# Altium PCB Copy of msp430g2553.PcbDoc
Units mil, origin at the board's own origin, x right, y up, seen from the top; angles counter-clockwise.
Board outline 2455 x 3285 mil, 2 copper layers (Top Layer, Bottom Layer); 27 components, 20 nets, 111 pads, 11 vias.
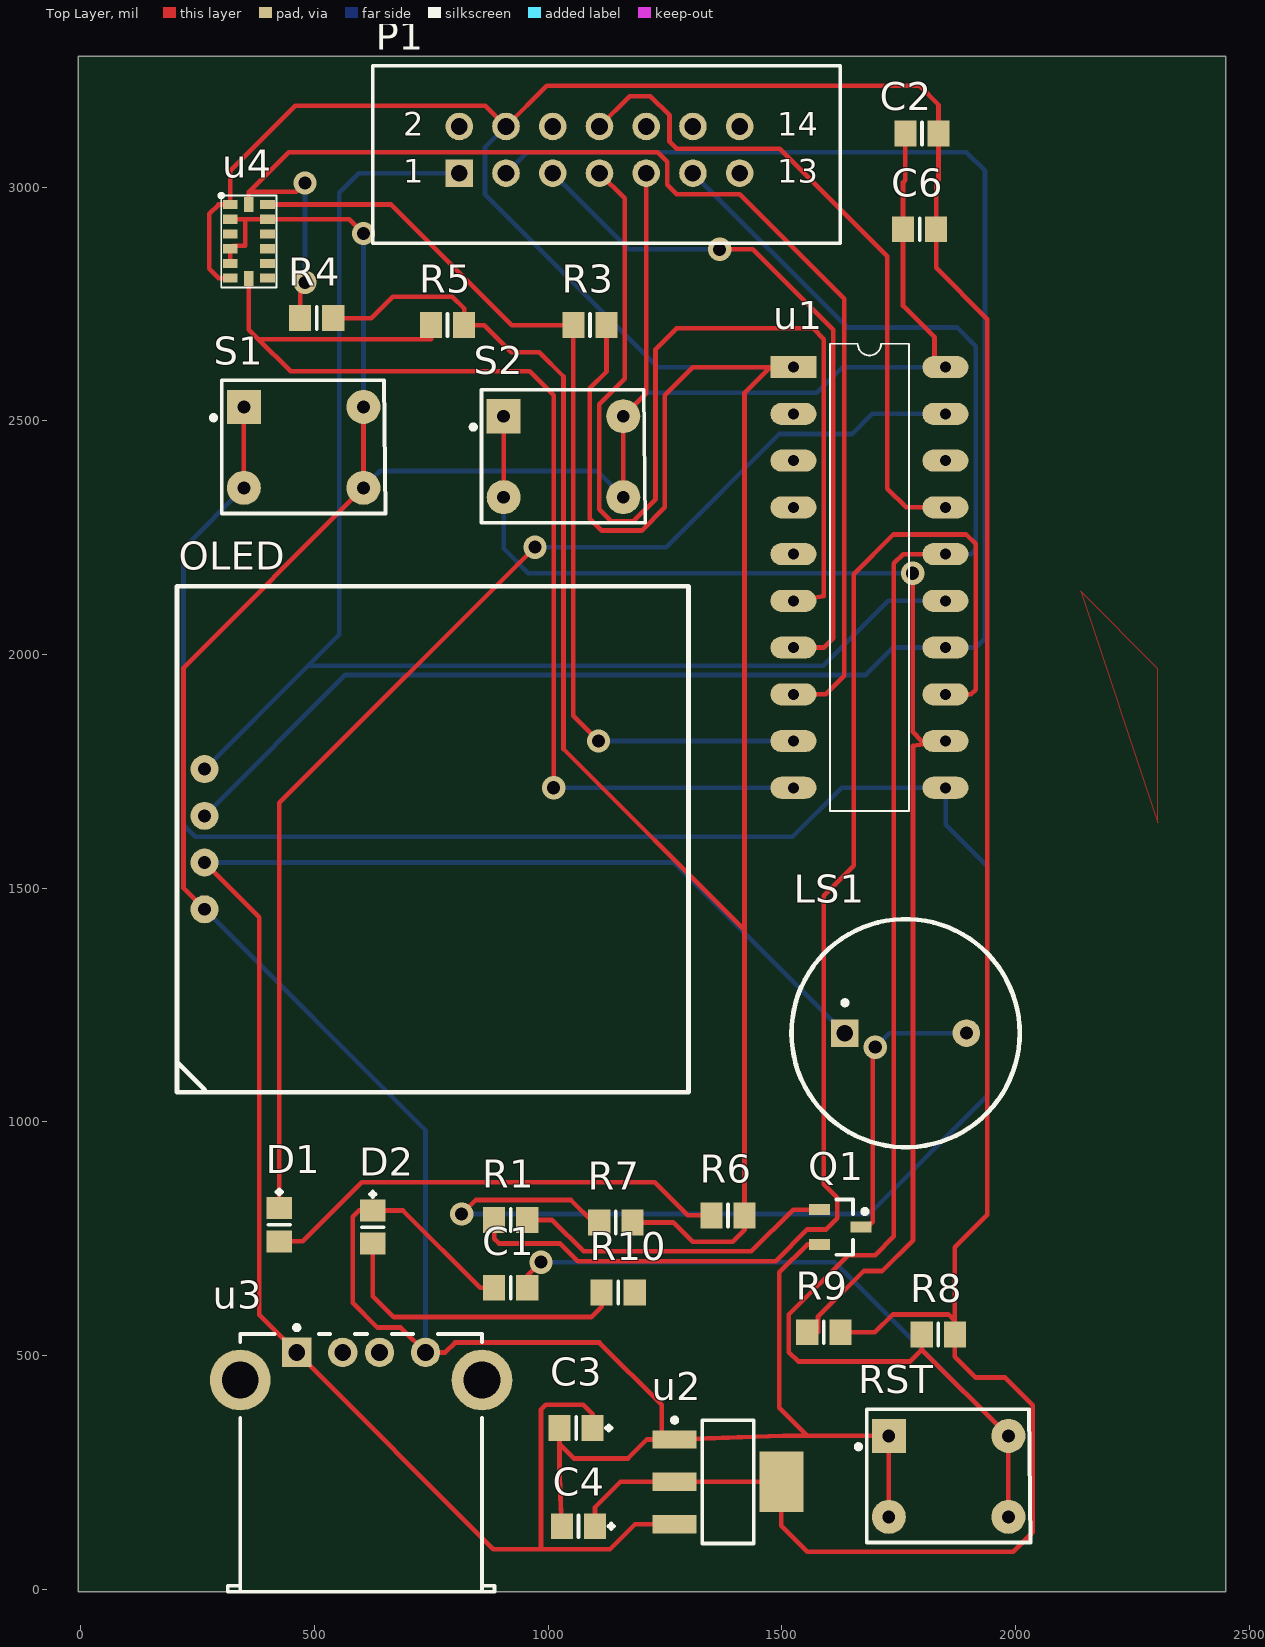
[diagram p0: Top Layer view]
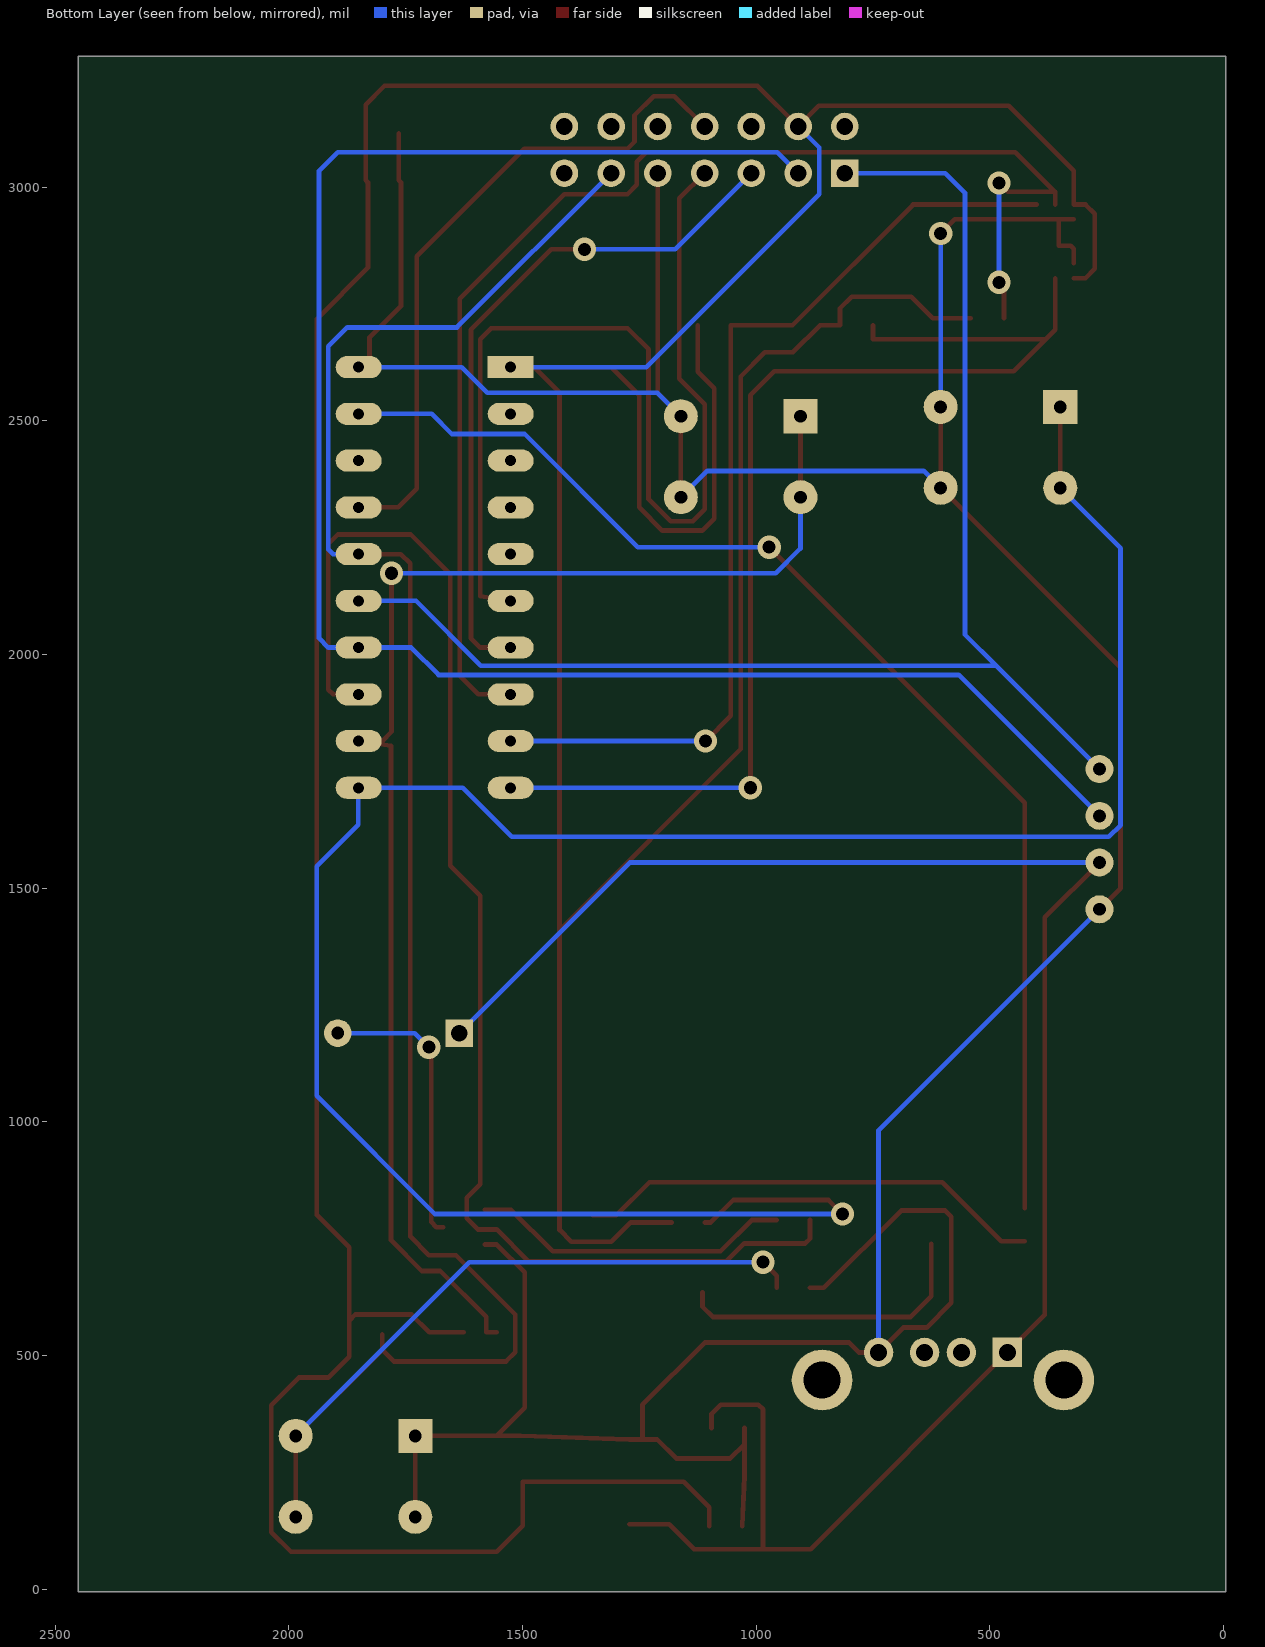
[diagram p1: Bottom Layer view, seen from below]

## Layer stack, top to bottom
Top Solder: solder mask 0.4, Solder Resist, Dk 3.5
Top Layer: signal copper 1.4
Dielectric 1: dielectric 12.6, FR-4, Dk 4.8
Bottom Layer: signal copper 1.4
Bottom Solder: solder mask 0.4, Solder Resist, Dk 3.5

## Board outline
-5,-5 2450,-5 2450,3280 -5,3280

## Design rules (kind name [scope] priority, off if disabled: settings)
Clearance [All] p1: gap=10 ignorepadtopadclearanceinfootprint=FALSE except(0: Arc-Hole Track-Hole SMDPad-Hole THPad-Hole Via-Hole Fill-Hole Poly-Hole Region-Hole Text-Hole)
PolygonConnect [All] p1: connectstyle=Relief reliefconductorwidth=10 reliefentries=4 polygonreliefangle="90 Angle" airgapwidth=10
RoutingVias [All] p1: holewidth=28 width=50 viastyle="Through Hole" minholewidth=28 minwidth=50 maxholewidth=28 maxwidth=50
SolderMaskExpansion [All] p1: expansion=4
Width [All] p1: maxlimit=10 minlimit=10 preferedwidth=10
30 further rules are at their usual default settings.

## Components (designator, comment, footprint, x,y, rotation, side; value= is the part's Value field where it differs from the comment)
C1 "Cap" 6-0805_N 920,645 r0 top value=100pF
C2 "Cap" 6-0805_N 1800,3115 r0 top value=100pF
C3 "Cap Pol2" "6-0805_N - duplicate" 1060,345 r0 top value=10uF
C4 "Cap Pol2" "6-0805_N - duplicate" 1065,135 r0 top value=22uF
C6 "Cap" 6-0805_N 1795,2910 r0 top value=100pF
D1 "LED0" "6-0805_N - duplicate" 425,780 r90 top
D2 "LED0" "6-0805_N - duplicate" 625,775 r90 top
LS1 "Bell" bell 1635.16,1190 r0 top
OLED "+5" OLED 1300.43,1063.66 r90 top
P1 "JTAG" HDR2X7 810,3030 r0 top
Q1 "NPN" SOT23_N 1625,775 r0 top
R1 "Res2" 6-0805_N 920,790 r0 top value=1K
R3 "Res2" 6-0805_N 1089.57,2705 r0 top value=1K
R4 "Res2" 6-0805_N 505,2720 r0 top value=1K
R5 "Res2" 6-0805_N 785,2705 r0 top value=1K
R6 "Res2" 6-0805_N 1385,800 r0 top value=1K
R7 "Res2" 6-0805_N 1145,785 r0 top value=1K
R8 "Res2" 6-0805_N 1835,545 r0 top value=1K
R9 "Res2" 6-0805_N 1590,550 r0 top value=1K
R10 "Res2" 6-0805_N 1150,635 r0 top value=1K
RST "SW-DPST" DPST-4 1729.09,155 r0 top
S1 "SW-DPST" DPST-4 349.09,2356.77 r0 top
S2 "SW-DPST" DPST-4 905,2336.77 r0 top
u1 "msp430g2553_PDIP20" DIP20 1525,2615 r0 top
u2 "AMS1117-3.3V" SOT223_N 1385,230 r0 top
u3 "USB" USB2.5-2H4 600,-5 r270 top
u4 "ADXL345" ADXL345 300.71,2982.28 r0 top

## Footprints (in the part's own frame and the unit in brackets; to place one, negate y for a bottom-side part, rotate by r counter-clockwise, add the part's x,y. Pads: shape width x height; smd on the part's side, far side on the other; paste and mask are expansions set on the pad)
6-0805_N [mm] "Chip Resistor, Body 2.0x1.2mm, IPC Medium Density"
  rect 1.2x1.4 smd: 1(-0.9,0) 2(0.9,0)
  silkscreen extent 0,-0.6 0,0.6, body extent -1.07,-0.7 1.07,0.7, height 0.7
"6-0805_N - duplicate" [mm] "Chip Resistor, Body 2.0x1.2mm, IPC Medium Density"
  rect 1.2x1.4 smd: 1(-0.9,0) 2(0.9,0)
  silkscreen extent 0,-0.6 1.91,0.6, body extent -1.07,-0.7 1.07,0.7, height 0.7
ADXL345 [mm]
  rect 0.813x0.5 smd: 1(0.49,-0.49) 2(0.49,-1.29) 3(0.49,-2.09) 4(0.49,-2.89) 5(0.49,-3.69) 6(0.49,-4.49) 8(2.51,-4.49) 9(2.51,-3.69) 10(2.51,-2.89) 11(2.51,-2.09) 12(2.51,-1.29) 13(2.51,-0.49)
  rect 0.5x0.813 smd: 7(1.5,-4.51) 14(1.5,-0.49)
  silkscreen extent -0.13,-5 3,0.13
bell [mm] "Photosensitive Diode; 2 Leads"
  rect 1.5x1.5 hole 0.9: 1(0,0)
  round 1.5 hole 0.7: 2(6.6,0)
  silkscreen extent -2.9,-6.2 9.5,6.2
DIP20 [mm]
  rect 2.5x1.2 hole 0.6: 1(0,0)
  oval 2.5x1.2 hole 0.6: 2(0,-2.54) 3(0,-5.08) 4(0,-7.62) 5(0,-10.16) 6(0,-12.7) 7(0,-15.24) 8(0,-17.78) 9(0,-20.32) 10(0,-22.86) 11(8.26,-22.86) 12(8.26,-20.32) 13(8.26,-17.78) 14(8.26,-15.24) 15(8.26,-12.7) 16(8.26,-10.16) 17(8.26,-7.62) 18(8.26,-5.08) 19(8.26,-2.54) 20(8.26,0)
  silkscreen extent 1.99,-24.13 6.28,1.27
DPST-4 [mm] "Switch; 4 Leads"
  rect 1.85x1.85 hole 0.7: 1(0,4.4)
  round 1.85 hole 0.7: 2(0,0) 3(6.5,4.4) 4(6.5,0)
  silkscreen extent -1.78,-1.4 7.7,5.84
HDR2X7 [mm] "Connector; Header; 7x2 Position"
  rect 1.5x1.5 hole 0.9: 1(0,0)
  round 1.5 hole 0.9: 2(0,2.54) 3(2.54,0) 4(2.54,2.54) 5(5.08,0) 6(5.08,2.54) 7(7.62,0) 8(7.62,2.54) 9(10.16,0) 10(10.16,2.54) 11(12.7,0) 12(12.7,2.54) 13(15.24,0) 14(15.24,2.54)
  silkscreen extent -4.7,-3.81 20.7,5.84
OLED [mm]
  round 1.524 hole 0.7: 1(12.48,26.3) 2(9.94,26.3) 3(15.02,26.3) 4(17.56,26.3)
  silkscreen extent 0,0 27.5,27.81
SOT23_N [mm] "SOT23, 3-Leads, Body 2.9x1.3mm, Pitch 0.95mm, Lead Span 2.3mm - Reverse Pinning, IPC Medium Density"
  rect 1.15x0.6 smd: 1(1.125,0) 2(-1.125,0.95) 3(-1.125,-0.95)
  silkscreen extent -0.2,-1.5 1.48,1.5, body extent -0.7,-1.5 0.7,1.5, height 1.1
SOT223_N [mm] "SOT223, 4-Leads, Body 6.5x3.5mm, Pitch 2.3mm, Lead Span 7mm, IPC Medium Density"
  rect 2.4x1 smd: 1(-2.9,2.3) 2(-2.9,0) 3(-2.9,-2.3)
  rect 2.4x3.3 smd: 4(2.9,0)
  silkscreen extent -3.02,-3.35 1.4,3.47, body extent -1.85,-3.35 1.85,3.35, height 1.7
USB2.5-2H4 [mm] "Connector; USB1.1, Series A, Reverse Type, Thru-Hole; 4 Position; Right Angle"
  rect 1.6x1.6 hole 0.92: 1(-13,-3.5)
  round 1.6 hole 0.92: 2(-13,-1) 3(-13,1) 4(-13,3.5)
  round 3.3 hole 2: 5(-11.5,6.57) 6(-11.5,-6.57)
  silkscreen extent -14.47,-7.25 0,7.25, body extent -14,-7.25 0,7.25, height 6.5

## Part data
C1 C2 C6: "Capacitor", LatestRevisionDate=17-Jul-2002, LatestRevisionNote="Re-released for DXP Platform.", PackageDescription="Radial Cap, Thru-Hole; 2 Leads; 0.3 in Pin Spacing", PackageReference=RAD-0.3, Published=8-Jun-2000, Publisher="Altium Limited"
C3 C4: "Polarized Capacitor (Axial)", LatestRevisionDate=17-Jul-2002, LatestRevisionNote="Re-released for DXP Platform.", PackageDescription="Polarized Capacitor; 2 Leads", PackageReference=POLAR0.8, Published=8-Jun-2000, Publisher="Altium Limited"
D1 D2: "Typical INFRARED GaAs LED", LatestRevisionDate=08-Jul-2005, LatestRevisionNote="Mech Layer 1 removed.", PackageDescription="LED; 2 Leads", PackageReference=LED-0, Published=8-Jun-2000, Publisher="Altium Limited"
LS1: "Electrical Bell", LatestRevisionDate=17-Jul-2002, LatestRevisionNote="Re-released for DXP Platform.", PackageReference=PIN2, Published=24-Mar-1999, Publisher="Altium Limited"
OLED: library part OLED
P1: "Header, 7-Pin, Dual row", LatestRevisionDate=17-Jul-2002, LatestRevisionNote="Re-released for DXP Platform.", Publisher="Altium Limited"
Q1: "NPN Bipolar Transistor", Code_JEDEC=TO-226-AA, LatestRevisionDate=17-Jul-2002, LatestRevisionNote="Re-released for DXP Platform.", PackageDescription="TO, Flat Index; 3 In-Line, Axial Leads; Body Dia. 4.8mm; Leads 0.55 x 0.51 mm (max)", PackageReference=TO-226-AA, Published=8-Jun-2000, Publisher="Altium Limited"
R1 R3 R4 R5 R6 R7 R8 R9 R10: "Resistor", LatestRevisionDate=17-Jul-2002, LatestRevisionNote="Re-released for DXP Platform.", PackageDescription="Axial Device, Thru-Hole; 2 Leads; 0.4 in Pin Spacing", PackageReference=AXIAL-0.4, Published=8-Jun-2000, Publisher="Altium Limited"
RST S1 S2: "Double-Pole, Single-Throw Switch", LatestRevisionDate=17-Jul-2002, LatestRevisionNote="Re-released for DXP Platform.", PackageDescription="Switch; 4 Leads", PackageReference=DPST-4, Published=24-Mar-1999, Publisher="Altium Limited"

## Via types
v1: diameter 50, hole 28, Top Layer to Bottom Layer, 11 vias

## Nets (pads, with @x,y where several pads share a name; then routed paths per layer and width w, separated by ;. In a path a pad name is that pad's centre, name@x,y a point inside that pad or via, vN(x,y) a via of type N, cw(c..) or ccw(c..) an arc to the next point about the centre after c; other vN are vias at no path point)
+5V: C3.2 LS1.1 OLED.1 u2.3 u3.1 | length 4108.1
  Top Layer w10: OLED.1 382,1438 382,587.02 u3.1 883.02,86 985,86 ; C3.2 1095.43,375 1075.43,395 995,395 985,385 985,86 ; u2.3 1186,139.45 1132.55,86 985,86
  Bottom Layer w10: OLED.1 1270.16,1555 LS1.1
BEEP: R1.1 u1.13 | length 2934.1
  Top Layer w10: R1.1 884.57,750.43 895,740 1025.43,740 1063.43,702 1487,702 1555,770 1595,770 1619,794 1619,838 1590,867 1590,1484 1654,1548 1654,2172 1739,2257 1895,2257 1915,2237 1915,1925 1905,1915 u1.13
CS: R5.1 u1.10 u4.7 | length 2572.4
  Top Layer w10: u4.7 359.76,2695.24 380,2675 ; R5.1 749.57,2675 380,2675 ; v1(1012,1715) 1012,2555 961,2606 449,2606 380,2675
  Bottom Layer w10: v1(1012,1715) u1.10
GND: C1.1 C2.1 C3.1 C4.1 C6.1 D2.2 OLED.2 P1.9 Q1.3 RST.1 RST.2 S1.3 S1.4 S2.3 S2.4 u1.20 u2.1 u3.4 u4.2 u4.4 u4.5 u4.12 | length 8788.8
  Top Layer w10: OLED.2 220,1500 220,1971.77 S1.4 S1.3 ; u4.5 u4.4 326.5,2875 352,2875 352,2931.5 ; u4.2 352,2931.5 ; v1(605,2901) 574.5,2931.5 u4.12 352,2931.5 ; C1.1 855,645 689.57,810.43 D2.2 595,810.43 582,797.43 582,613 635,560 684.61,560 u3.4 779.81,506.81 801,528 1110,528 1243,395 u2.1@1243,320.55 ; C3.1 1024.57,310.43 ; C4.1 1024.57,242 1024.57,310.43 ; S2.4 S2.3 1210,2559.09 P1.9 ; Q1.3 1554.6,737.6 1495,678 1495,388.23 1555,328.23 ; RST.2 RST.1 1555,328.23 ; C2.1 1764.57,3015 1759.57,3010 C6.1 1759.57,2746 1827,2678.57 1827,2615 u1.20 ; 1024.57,310.43 1055,280 1171,280 1211.55,320.55 u2.1@1243,320.55 ; u2.1@1243,320.55 u2.1 1503.68,328.23 1555,328.23
  Bottom Layer w10: OLED.2 737.79,982.21 u3.4 ; S1.4 641.23,2393 1104.68,2393 S2.4 ; S1.3 v1(605,2901) ; S2.3 1210.91,2560 1575,2560 1630,2615 u1.20
LED1: D1.2 u1.19 | length 2637.4
  Top Layer w10: D1.2 425,1683 v1(972,2230)
  Bottom Layer w10: v1(972,2230) 1253,2230 1495,2472 1651,2472 1694,2515 u1.19
NetD1_1: D1.1 R6.1 | length 1006.3
  Top Layer w10: D1.1 475,744.57 601.43,871 1228,871 1299,800 R6.1
NetD2_1: D2.1 R10.1 | length 659.9
  Top Layer w10: D2.1 625,627 669.56,582.44 1092.01,582.44 1114.57,605 R10.1
NetLS1_2: LS1.2 Q1.1 | length 613.8
  Top Layer w10: Q1.1 1684,775 1695,786 1695,1155 v1(1700,1160)
  Bottom Layer w10: v1(1700,1160) 1730,1190 LS1.2
NetQ1_2: Q1.2 R1.2 | length 690.1
  Top Layer w10: R1.2 1009,790 1076,723 1435,723 1524.4,812.4 Q1.2
RST: C1.2 P1.11 R8.1 RST.3 RST.4 u1.16 | length 5186.8
  Top Layer w10: C1.2 955.43,670.43 v1(985,700) ; R8.1 1799.57,512.14 ; u1.16 1760,2215 1740,2195 1740,755 1700,715 1642,715 1515,588 1515,507.57 1535,487.57 1775,487.57 1799.57,512.14 ; RST.4 RST.3 1799.57,512.14
  Bottom Layer w10: v1(985,700) 1613.23,700 RST.3 ; P1.11 1640,2700 1875,2700 1915,2660 1915,2225 1905,2215 u1.16
SCL: OLED.3 P1.3 u1.14 | length 3887.6
  Bottom Layer w10: OLED.3 566.38,1956.38 1679.38,1956.38 1738,2015 u1.14 1915,2015 1935,2035 1935,3035 1895,3075 955,3075 P1.3
SCLK: R4.1 u1.8 u4.14 | length 2848.5
  Top Layer w10: u4.14 359.76,2989 ; R4.1 469.57,2786.14 v1(480,2796.57) ; v1(480,3009) 461,2990 360.76,2990 ; u1.8 1594,1915 1634,1955 1634,2761 1410,2985 1275,2985 1255,3005 1255,3054.53 1235,3074.53 445.29,3074.53 360.76,2990 ; 359.76,2989 360.76,2990 ; 359.76,2989 359.76,2990 360.76,2990
  Bottom Layer w10: v1(480,2796.57) v1(480,3009)
SDA: OLED.4 P1.1 u1.15 | length 3047.9
  Bottom Layer w10: OLED.4 486.38,1976.38 ; P1.1 595,3030 553,2988 553,2043 486.38,1976.38 ; u1.15 1727.62,2115 1589,1976.38 486.38,1976.38
SDI: R3.1 u1.9 u4.13 | length 2090.8
  Top Layer w10: u4.13 664.01,2962.99 922,2705 R3.1 1054.13,1868.87 v1(1108,1815)
  Bottom Layer w10: v1(1108,1815) u1.9
SW1: R7.1 S1.1 S1.2 u1.11 | length 4885.9
  Top Layer w10: S1.2 S1.1 ; v1(815,803) 845,833 1049,833 1097,785 R7.1
  Bottom Layer w10: S1.2 220,2227.68 220,1635 245,1610 1523,1610 1628,1715 u1.11 1851,1715 1851,1636 1940,1547 1940,1056 1687,803 v1(815,803)
SW2: R9.1 S2.1 S2.2 u1.12 | length 3052.7
  Top Layer w10: S2.2 S2.1 ; R9.1 1577.44,550 1577.44,583 1675.44,681 1715,681 1781,747 1781,1805 u1.12 1800,1815 1780,1835 v1(1780,2174)
  Bottom Layer w10: S2.2 905,2227 958,2174 v1(1780,2174)
TCK: P1.7 u1.6 | length 2239
  Top Layer w10: P1.7 1164,2976 1164,2590.42 1109.49,2535.91 1109.49,2310.87 1135,2285.35 1182.68,2285.35 1230,2332.68 1230,2653 1275,2698 1567,2698 1590,2675 1590,2125 u1.6
TEST: P1.8 u1.17 | length 1456.2
  Top Layer w10: P1.8 1175,3195 1219,3195 1260,3154 1260,3097 1275,3082 1496,3082 1726,2852 1726,2355 1766,2315 u1.17
TMS: P1.5 u1.7 | length 1492
  Top Layer w10: v1(1367,2867) 1438,2867 1610,2695 1610,2035 1590,2015 u1.7
  Bottom Layer w10: P1.5 1173,2867 v1(1367,2867)
VDD3V3: C2.2 C4.2 C6.2 P1.4 R3.2 R4.2 R5.2 R6.2 R7.2 R8.2 R9.2 u1.1 u2.2 u2.4 u4.1 u4.6 | length 12799.6
  Top Layer w10: u4.6 295,2805.51 275,2825.51 275,2942.99 295,2962.99 u4.1 320,3035 459.53,3174.53 865.47,3174.53 P1.4 997,3217 1795,3217 1835.43,3176.57 C2.2 1835.43,3015 1830.43,3010 C6.2 1830.43,2827.57 1940,2718 1940,801 1870.43,731.43 1870.43,575 ; R4.2 622,2720 668,2766 795,2766 820.43,2740.57 R5.2 863,2705 921,2647 981,2647 1033,2595 1033,1798 1420.43,1410.57 ; C4.2 1100.43,175.43 1155,230 u2.2 u2.4 1499.17,135.83 1555,80 1995,80 2037,122 2037,394 1978,453 1915,453 1870.43,497.57 R8.2 1870.43,575 ; R3.2 1125,2605 1089.49,2569.49 1089.49,2290.87 1115,2265.35 1200.35,2265.35 1250,2315 1250,2555 1310,2615 1475,2615 ; R7.2 1268,785 1309.57,743.43 1395,743.43 1420.43,768.87 R6.2 1420.43,1410.57 ; u1.1 1475,2615 ; R9.2 1699.35,550 1737.35,588 1857.43,588 1870.43,575 ; 1420.43,1410.57 1420.43,2560.43 1475,2615
  Bottom Layer w10: P1.4 865,3085 865,2985 1235,2615 u1.1
pads on no net: P1.2 P1.6 P1.10 P1.12 P1.13 P1.14 R10.2 u1.2 u1.3 u1.4 u1.5 u1.18 u3.2 u3.3 u3.5 u3.6 u4.3 u4.8 u4.9 u4.10 u4.11

## Polygon pours and split planes (outlines as drawn)
GND on Top Layer "GND_L01_P010" (solid, remove dead copper, pour order 10): 2305,1640 2305,1970 2140,2135
no net on Top Layer (solid, pour order 8): 655,2015

## Silkscreen, mask and mechanical layers (free items; w line width, h text height)
Mechanical 1:
  the board outline again, w10

## Text inside footprints (layer, text, board x,y; h text height)
P1: Top Overlay "13" at 1490,3010 h50; Top Overlay "14" at 1490,3110 h50; Top Overlay "1" at 690,3010 h50; Top Overlay "2" at 690,3110 h50
u3: Mechanical 1 "PCB Edge" at 351.84,8.21 h9.84